# Altium PCB 2024 Power Distribution Board.PcbDoc
Units mm, origin at the board's own origin, x right, y up, seen from the top; angles counter-clockwise.
Board outline 127 x 165.1 mm, 2 copper layers (Top Layer, Bottom Layer); 42 components, 35 nets, 200 pads, 0 vias.
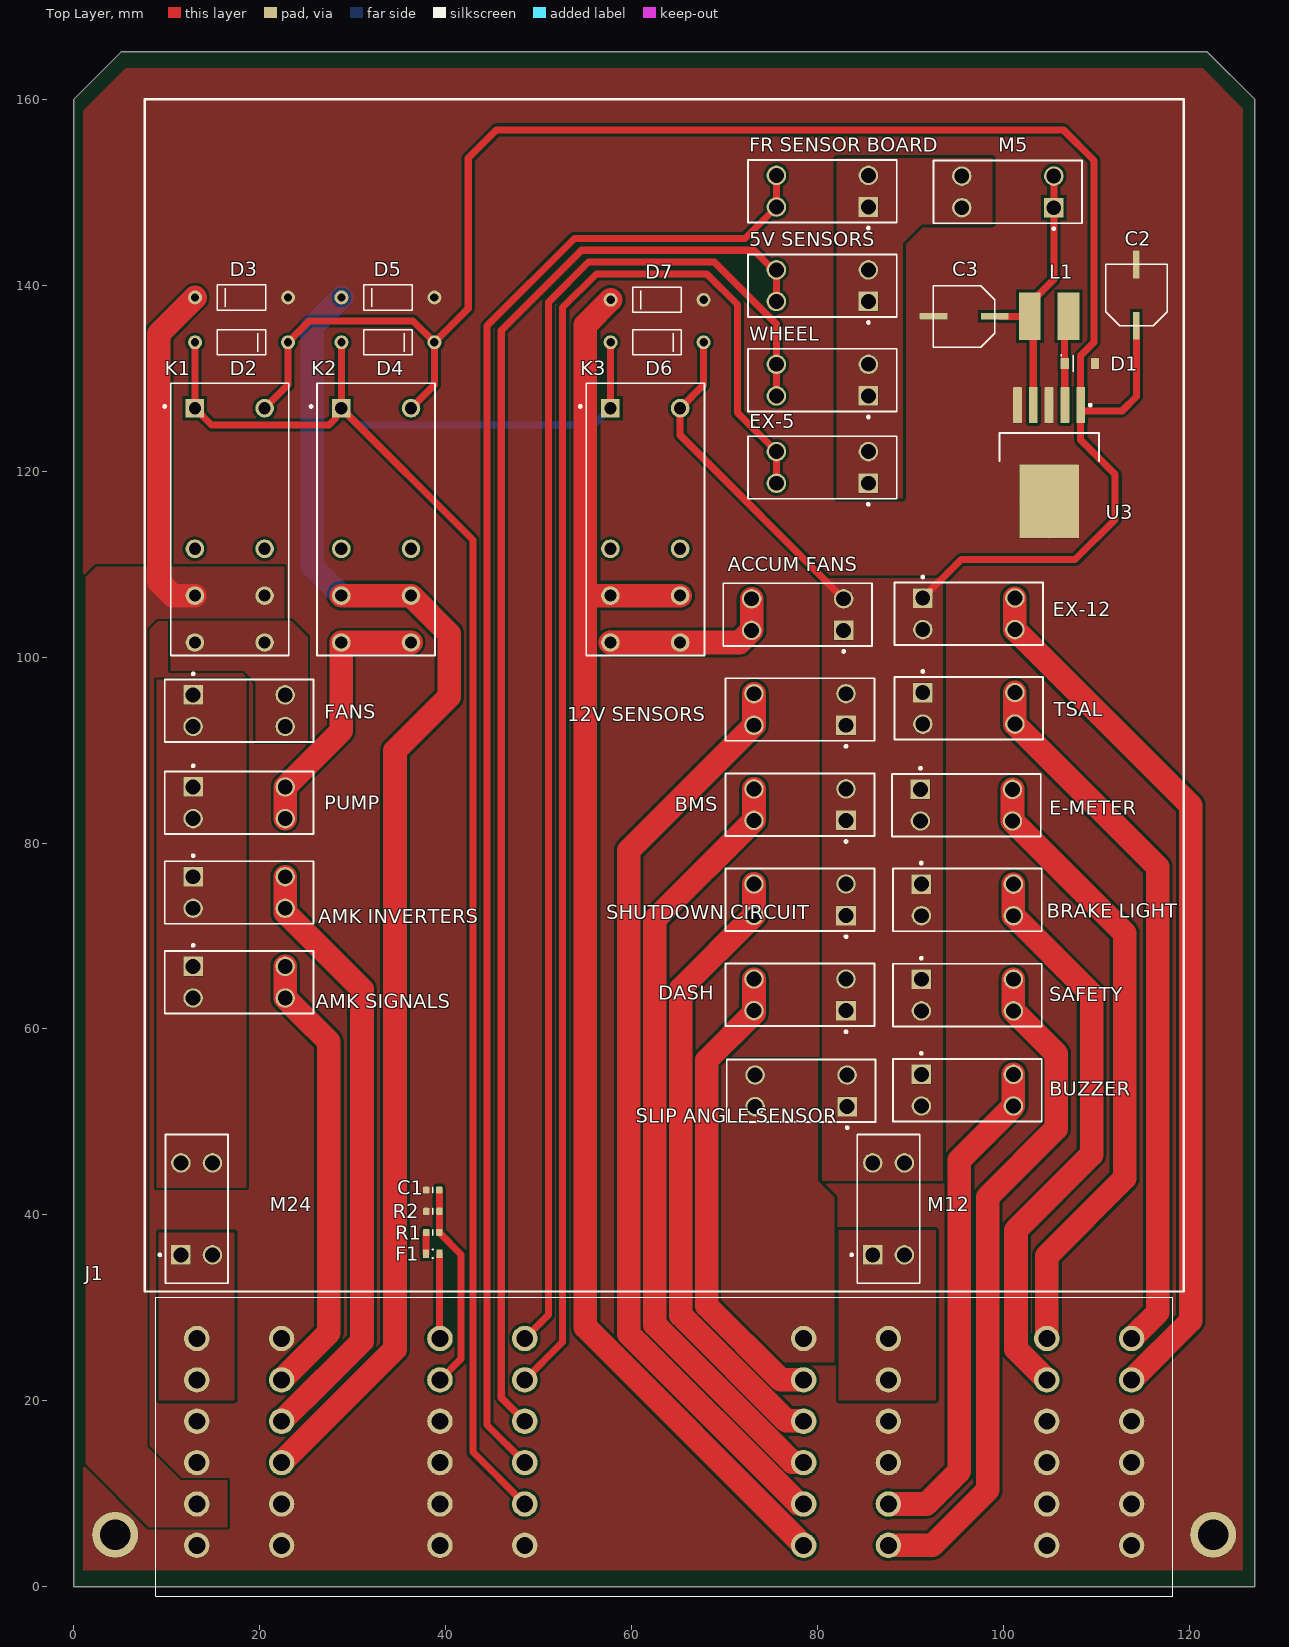
[diagram p0: Top Layer view]
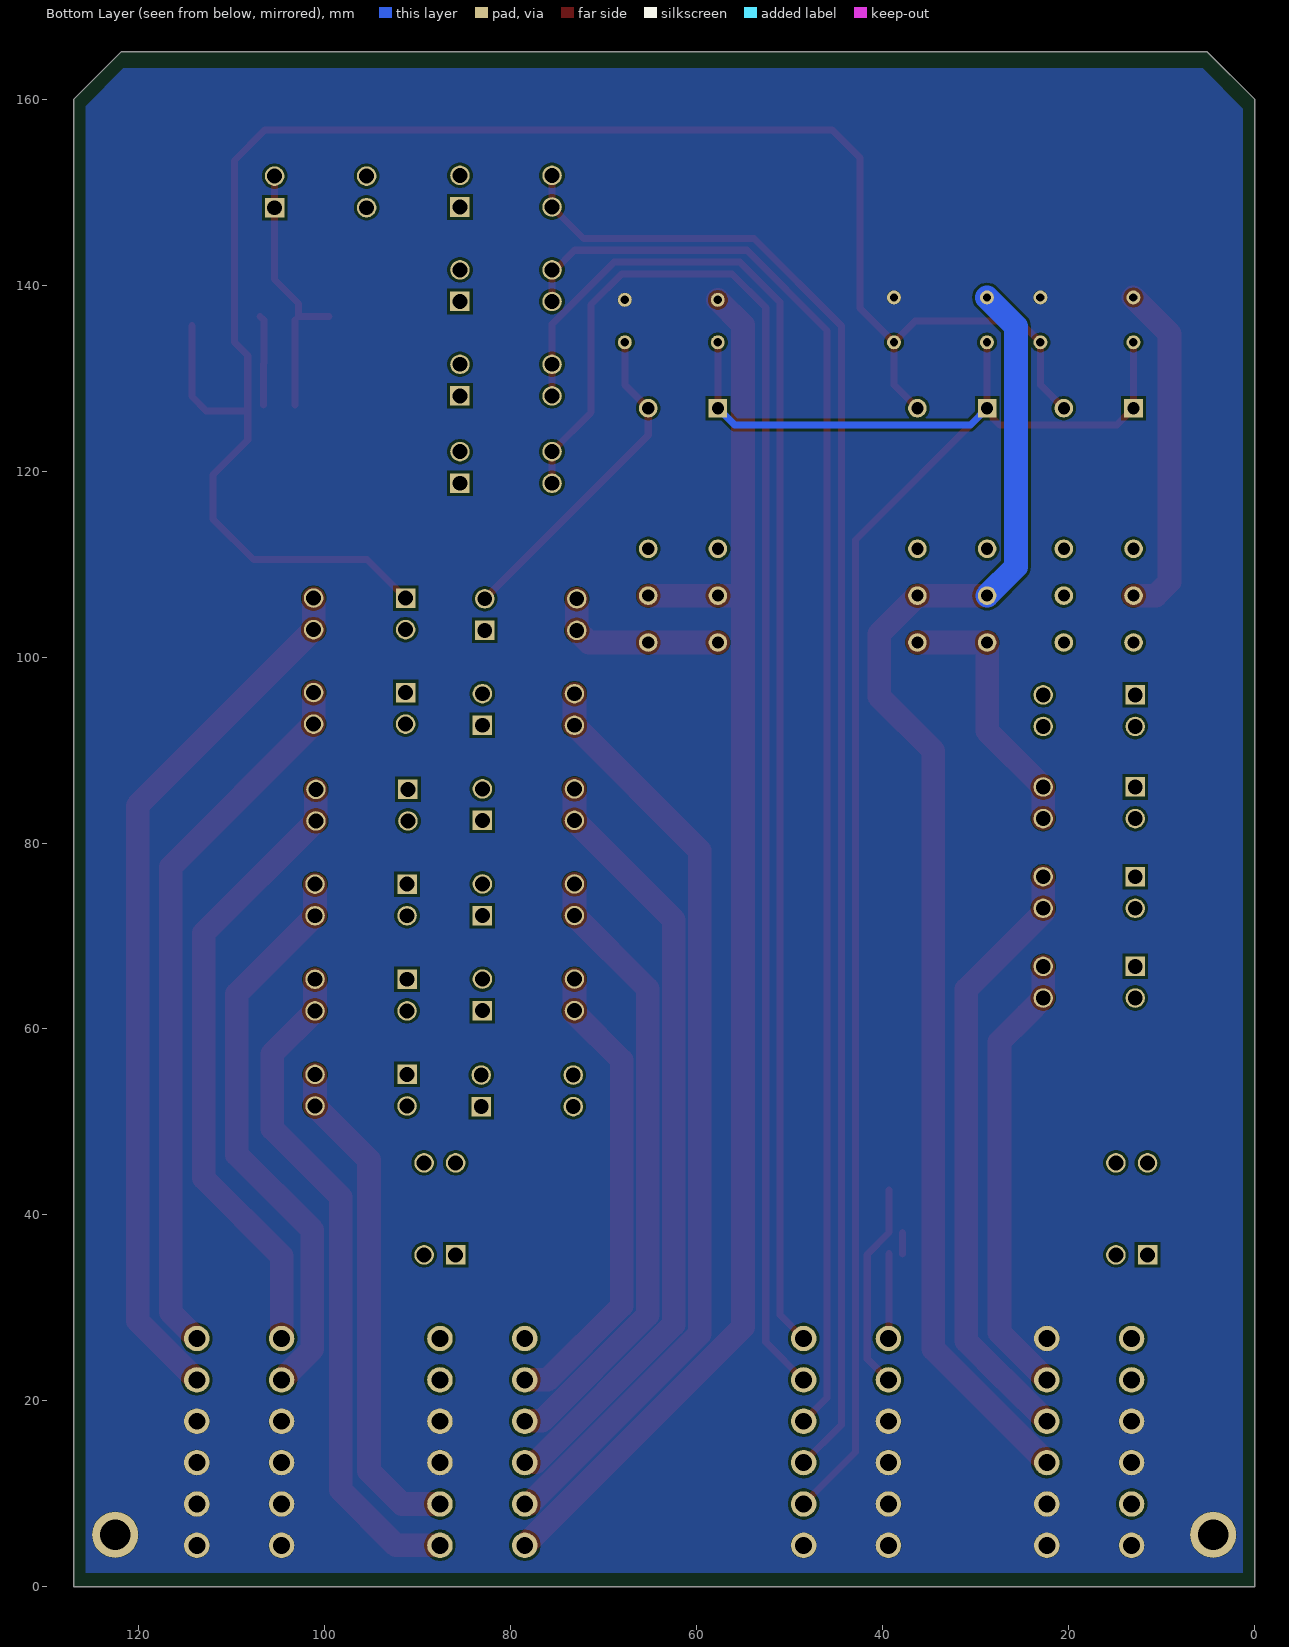
[diagram p1: Bottom Layer view, seen from below]
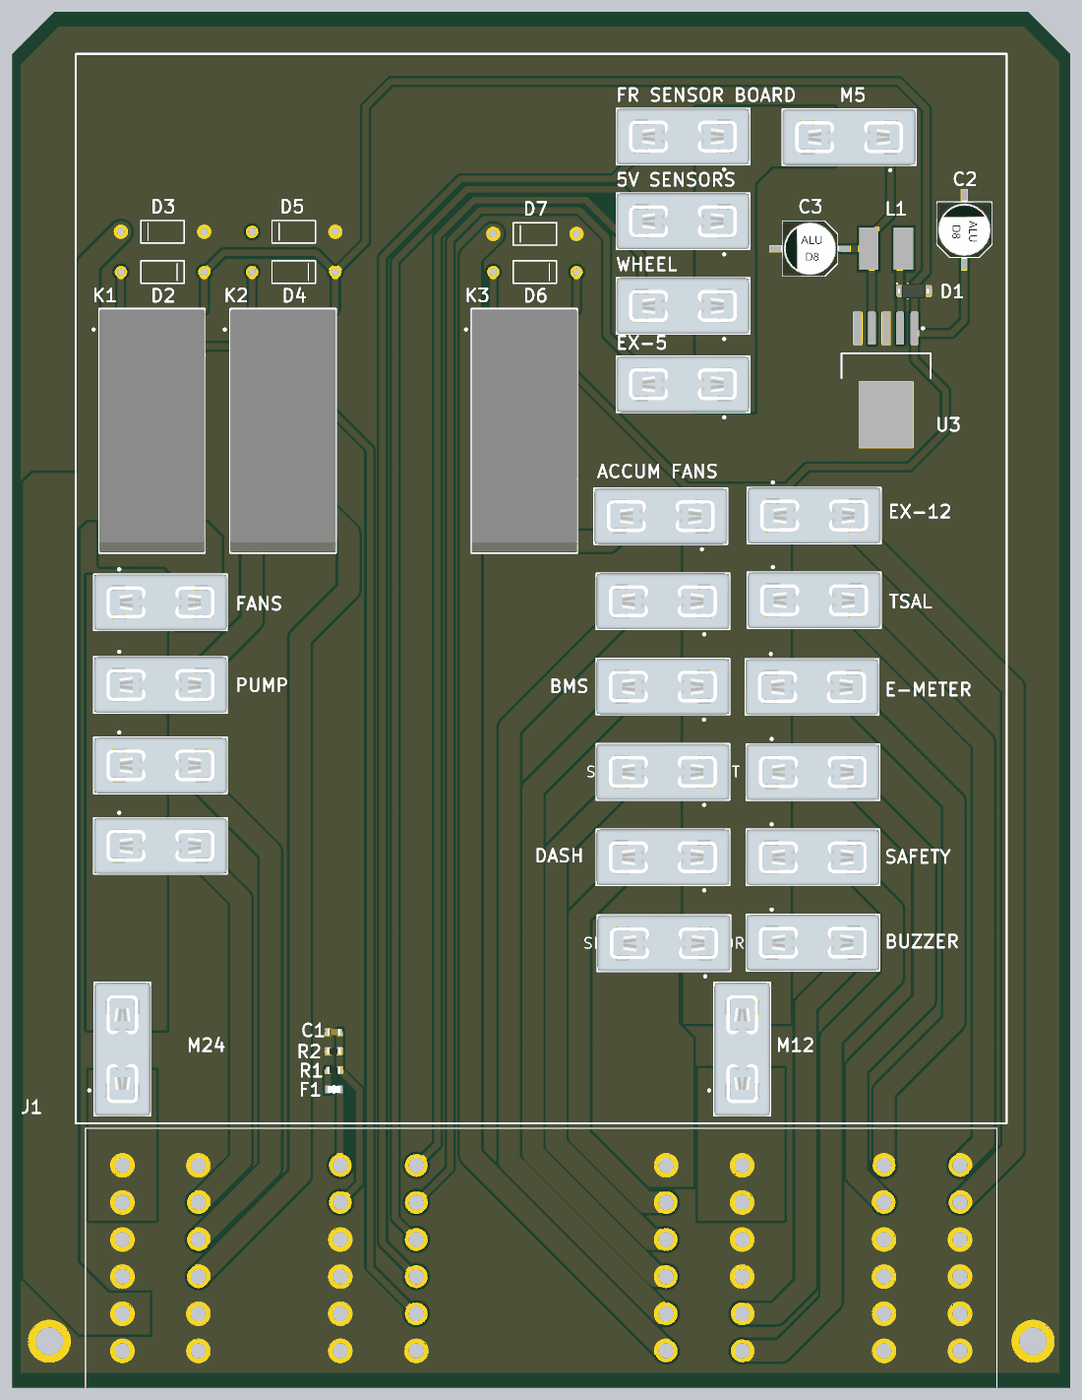
[diagram p2: 3D render of the assembled board from above, using the file's embedded part models]

## Layer stack, top to bottom
Top Solder: solder mask 0.0102, Solder Resist, Dk 3.5
Top Layer: signal copper 0.07
Dielectric 1: dielectric 0.32, FR-4, Dk 4.8
Bottom Layer: signal copper 0.07
Bottom Solder: solder mask 0.0102, Solder Resist, Dk 3.5

## Board outline
0,0 127,0 127,160.02 121.92,165.1 5.08,165.1 0,160.02

## Design rules (kind name [scope] priority, off if disabled: settings)
Clearance [All] p1: gap=0.3 ignorepadtopadclearanceinfootprint=FALSE except(0.13: SMDPad-SMDPad; 0.152: Arc-Arc Arc-Track Track-Track; 0.2: Arc-SMDPad Track-SMDPad)
Height [All] p1: minheight=0 maxheight=50.8 prefheight=12.7
PolygonConnect [All] p1: connectstyle=Relief reliefconductorwidth=0.254 reliefentries=4 polygonreliefangle="90 Angle" airgapwidth=0
RoutingVias [All] p1: holewidth=0.3 width=0.6 viastyle="Through Hole" minholewidth=0.3 minwidth=0.6 maxholewidth=0.3 maxwidth=0.6
SolderMaskExpansion [All] p1: expansion=0.102 istentingtop=FALSE
Width [All] p1: maxlimit=7.62 minlimit=0.254 preferedwidth=0.508 minimp=50.000000 maximp=50.000000 favimp=50.000000
29 further rules are at their usual default settings.

## Classes and differential pairs
component class "2024 LV BMS": C1 F1 R1 R2

## Components (designator, comment, footprint, x,y, rotation, side; value= is the part's Value field where it differs from the comment)
"5V SENSORS" "5V Sensors" KSTN-3568_V 80.518,139.954 r180 top
"12V SENSORS" "12V Sensors" KSTN-3568_V 78.105,94.361 r180 top
"ACCUM FANS" "ACCUM FANS" KSTN-3568_V 77.854,104.57 r180 top
"AMK INVERTERS" "AMK Inverter" KSTN-3568_V 17.78,74.676 r0 top
"AMK SIGNALS" "AMK Signals" KSTN-3568_V 17.78,65.024 r0 top
BMS "BMS Primary" KSTN-3568_V 78.105,84.128 r180 top
"BRAKE LIGHT" "Brake Light" KSTN-3568_V 96.112,73.878 r0 top
BUZZER "Buzzer" KSTN-3568_V 96.112,53.413 r0 top
C1 "CMP-001-00016-4" CAPC0603(1608)100_L 38.608,42.672 r180 top value=10µF
C2 "680uF" CAP-6.3D7.7H-SMD 114.3,138.938 r90 top
C3 "220uF" CAP-6.3D7.7H-SMD 95.756,136.652 r180 top
D1 "CMP-051-000011-1" SOD123 108.204,131.572 r0 top
D2 "1N914" DO41-10 18.034,133.858 r0 top
D3 "1N914" DO41-10 18.034,138.684 r180 top
D4 "1N914" DO41-10 33.782,133.858 r0 top
D5 "1N914" DO41-10 33.782,138.684 r180 top
D6 "1N914" DO41-10 62.738,133.858 r0 top
D7 "1N914" DO41-10 62.738,138.43 r180 top
DASH "Dashboard" KSTN-3568_V 78.105,63.663 r180 top
E-METER "E-Meter" KSTN-3568_V 96.012,84.074 r0 top
EX-5 "EX-5" KSTN-3568_V 80.518,120.396 r180 top
EX-12 "EX-12-D" KSTN-3568_V 96.266,104.648 r0 top
F1 "SF-0603S050-2" FP-SF-0603S-MFG 38.608,35.814 r0 top value=232mΩ
FANS "Fans" KSTN-3568_V 17.78,94.234 r0 top
"FR SENSOR BOARD" "Front Sensor Board" KSTN-3568_V 80.518,150.114 r180 top
J1 "DT13-12PA-R015" DT1312PAR015 104.66,26.698 r180 top locked
K1 "RZ03-1C4-D012" FP-RZ03-1C4-D024-MFG 16.764,114.808 r270 top
K2 "RZ03-1C4-D012" FP-RZ03-1C4-D024-MFG 32.512,114.808 r270 top
K3 "RZ03-1C4-D012" FP-RZ03-1C4-D024-MFG 61.468,114.808 r270 top
L1 "33uH" IND-6045 104.902,136.652 r180 top
M5 "MASTER 5V" KSTN-3568_V 100.46,150.036 r180 top
M12 "MASTER 12V" KSTN-3568_V 87.63,40.64 r90 top
M24 "MASTER 24V" KSTN-3568_V 13.208,40.64 r90 top
PUMP "Pump" KSTN-3568_V 17.78,84.328 r0 top
R1 "CMP-009-00069-1" RESC0603(1608)_L 38.608,38.1 r180 top value=100k
R2 "CMP-009-00069-1" RESC0603(1608)_L 38.608,40.386 r0 top value=5k
SAFETY "Safety" KSTN-3568_V 96.112,63.645 r0 top
"SHUTDOWN CIRCUIT" "Shutdown Circuit" KSTN-3568_V 78.105,73.896 r180 top
"SLIP ANGLE SENSOR" "Slip Angle Sensor" KSTN-3568_V 78.232,53.34 r180 top
TSAL "TSAL" KSTN-3568_V 96.266,94.488 r0 top
U3 "LM2592HVS-5.0" KTT0005B_L 104.902,120.904 r270 top
WHEEL "Steering Wheel Board" KSTN-3568_V 80.518,129.794 r180 top

## Footprints (in the part's own frame and the unit in brackets; to place one, negate y for a bottom-side part, rotate by r counter-clockwise, add the part's x,y. Pads: shape width x height; smd on the part's side, far side on the other; paste and mask are expansions set on the pad)
CAP-6.3D7.7H-SMD [mm]
  rect 3x0.7 smd: NEG(3.3,0) POS(-3.3,0)
  silkscreen extent -3.3,-3.3 3.3,3.3, body extent -3.5,-3.3 3.5,3.3, height 7.7
CAPC0603(1608)100_L [mm] "Chip Capacitor, Body 1.6x0.8mm, Height 1.0mm, IPC High Density"
  rrect25% 0.66x0.76 smd: 1(-0.7,0) 2(0.7,0)
  silkscreen extent 0,-0.3 0,0.3, body extent -0.8,-0.4 0.8,0.4, height 0.95
DO41-10 [mm]
  round 1.5 hole 0.9 unplated: A(-5,0) K(5,0)
  silkscreen extent -2.6,-1.35 2.6,1.35, body extent -2.6,-1.34 2.6,1.35, height 2.85
DT1312PAR015 [mm]
  round 2.739 hole 1.826: A1(0,0) A2(0,4.45) A3(0,8.9) A4(0,13.35) A5(0,17.8) A6(0,22.25) A7(-9.12,22.25) A8(-9.12,17.8) A9(-9.12,13.35) A10(-9.12,8.9) A11(-9.12,4.45) A12(-9.12,0) B1(91.44,0) B2(91.44,4.45) B3(91.44,8.9) B4(91.44,13.35) B5(91.44,17.8) B6(91.44,22.25) B7(82.32,22.25) B8(82.32,17.8) B9(82.32,13.35) B10(82.32,8.9) B11(82.32,4.45) B12(82.32,0) C1(26.16,0) C2(26.16,4.45) C3(26.16,8.9) C4(26.16,13.35) C5(26.16,17.8) C6(26.16,22.25) C7(17.04,22.25) C8(17.04,17.8) C9(17.04,13.35) C10(17.04,8.9) C11(17.04,4.45) C12(17.04,0) D1(65.28,0) D2(65.28,4.45) D3(65.28,8.9) D4(65.28,13.35) D5(65.28,17.8) D6(65.28,22.25) D7(56.16,22.25) D8(56.16,17.8) D9(56.16,13.35) D10(56.16,8.9) D11(56.16,4.45) D12(56.16,0)
  round 4.95 hole 3.3: MH1(-17.895,21.11) MH2(100.215,21.11)
  silkscreen extent -13.56,-4.45 95.88,27.71
FP-RZ03-1C4-D024-MFG [mm]
  round 2 hole 1.3 paste-1000 mask+0: 11(8.2,-3.75) 11(8.2,3.75) 12(3.16,3.75) 12(3.16,-3.75) 14(13.24,-3.75) 14(13.24,3.75) A2(-11.96,3.75)
  rect 2x2 hole 1.3 paste-1000 mask+0: A1(-11.96,-3.75)
  silkscreen extent -14.65,-7.12 14.65,6.35, body extent -14.6,-6.45 14.6,6.45, height 0.25
FP-SF-0603S-MFG [mm]
  rect 0.65x0.9 smd paste+0 mask+0: 1(-0.725,0) 2(0.725,0)
  silkscreen extent -0.03,-0.45 0.03,0.45, body extent -1.15,-0.55 1.15,0.55, height 0.25
IND-6045 [mm]
  rect 2.35x5.1 smd: 1(-2.075,0) 2(2.075,0)
  body extent -3.15,-3 3.15,3, height 4.5
KSTN-3568_V [mm] "THD, 4-Leads, Body 16x6.73mm, Pitch 9.9mm"
  rect 2.1x2.1 hole 1.6: 1(-4.95,1.7)
  round 2.1 hole 1.6: 2(-4.95,-1.7) 3(4.95,1.7) 4(4.95,-1.7)
  silkscreen extent -8,-3.36 8,4.09, body extent -8,-3.37 8,3.37, height 7.44
KTT0005B_L [mm] "DPAK, 5-Leads, Body 10.65x9.65mm, Pitch 1.7mm, IPC High Density"
  rrect11% 3.85x0.95 smd: 1(-6.2,3.4) 2(-6.2,1.7) 3(-6.2,0) 4(-6.2,-1.7) 5(-6.2,-3.4)
  rrect2% 7.9x6.4 smd: 6(4.15,0)
  silkscreen extent -6.32,-5.35 -0.2,5.35, body extent -3.2,-5.32 6.45,5.33, height 4.83
RESC0603(1608)_L [mm] "Chip Resistor, Body 1.6x0.8mm, IPC High Density"
  rrect25% 0.66x0.76 smd: 1(-0.7,0) 2(0.7,0)
  silkscreen extent 0,-0.3 0,0.3, body extent -0.8,-0.4 0.8,0.4, height 0.45
SOD123 [mm] "SODFL, 2-Leads, Body 1.55x3.70mm, IPC Medium Density"
  rect 0.9x1.2 smd: A(1.635,0) K(-1.635,0)
  silkscreen extent -2.03,-0.9 -0.7,0.95, body extent -1.85,-0.85 1.85,0.85, height 1.3

## Part data
"5V SENSORS" "12V SENSORS" "ACCUM FANS" "AMK INVERTERS" "AMK SIGNALS" BMS "BRAKE LIGHT" BUZZER DASH E-METER EX-5 EX-12 FANS "FR SENSOR BOARD" M5 M12 M24 PUMP SAFETY "SHUTDOWN CIRCUIT" "SLIP ANGLE SENSOR" TSAL WHEEL: library part CMP-2000-05464-1, "Fuse Holder, 20 A, 500 V, -50 to 145 degC, 4-Pin THD, RoHS", Manufacturer=Keystone, Package Description="4-Pin Through Hole Device, Body 16 x 6.73 mm, Pitch 9.9 mm", Package Reference=3568, Datasheet URL=https://datasheet.ciiva.com/16294/m60-2p40-16294706.pdf, Datasheet Version=04/2013, Manufacturer URL=http://www.keyelco.com/, Mounting Technology=ThroughHole
C1: library part CMP-005-000576-1, "Chip Capacitor, 10 uF, +/- 10%, 16 V, 1206 (3216 Metric)", Capacitor Type=Ceramic, Case/Package=1206, Max Operating Temperature=125°C, Min Operating Temperature=-55°C, Tolerance=10%, Voltage Rating=16V, Available Preview Images=2D, Design Item ID=CMP-001-00016-4, Mounting Technology=SM, Pins=2, RoHS Compliant=True, Source="Integrated_Library - 12.03.21 - 15.39.SchLib"
C2 C3: library part CMP-050-000005-1, Design Item ID=CAP-6.3D7.7H-SMD, Source=ife19_Elec_Library.SchLib
D2 D3 D4 D5 D6 D7: library part CMP-010-000010-1, Design Item ID=DIODE-DO41-10, Source=ife19_Elec_Library.SchLib
F1: library part CMP-07399-000004-1, "FUSE BOARD MNT 500MA 50VDC 0603", Fuse Current=0.5A, Fuse Interrupt Ac Current=50A, Manufacturer="Bourns Inc.", Max Fuse Ac Voltage=35V, Max Fuse Dc Voltage=50V, Package=SF-0603S, Resistance=232mΩ, Temperature="-20°C to +105°C", Temperature Range High=+105°C, Temperature Range Low=-20°C, Automotive=No, Category=Fuse, ComponentLink2Description=Datasheet, ComponentLink2URL=https://www.bourns.com/docs/product-datasheets/sf0603s.pdf, Device Class L1="Circuit Protection", Device Class L2=Fuses, Device Class L3=unset, Digikey Description="FUSE BOARD MNT 500MA 50VDC 0603", Fuse Blow Speed=Slow, Fuse I2T=0.009A2Sec, Fuse Interrupt Dc Current=50A, Height=0.55mm, Ipc Land Pattern Name=CAPC16080X45, Lead Free=Yes, Manufacturer Part Number=SF-0603S050-2, Mouser Description="Surface Mount Fuses 0.50A Slow Blow SinglFuse", Octopart=https://octopart.com/sf-0603s050-2-bourns-10486821, RoHS=TRUE
J1: library part CMP-057-000070-1, "Automotive Connectors EEC HEADER", Manufacturer_Name="TE Connectivity", Mouser Part Number=571-DT13-12PA-R015, Datasheet Link=https://www.te.com/commerce/DocumentDelivery/DDEController?Action=showdoc&DocId=Customer+Drawing%7FDT13-XPX-R015%7F-%7Fpdf%7FEnglish%7FENG_CD_DT13-XPX-R015_-.pdf%7FDT13-12PA-R015, Design Item ID=DT13-12PA-R015, Geometry.Height=53.25mm, Manufacturer_Part_Number=DT13-12PA-R015, Mouser Price/Stock=https://www.mouser.co.uk/ProductDetail/TE-Connectivity-DEUTSCH/DT13-12PA-R015?qs=cgQJD%2FpJz0xZmI47WX6OlA%3D%3D, Source=DT13-12PA-R015.SchLib
K1 K2 K3: library part CMP-03395-000132-1, "RELAY GEN PURPOSE SPDT 16A 24V", Ambient Temperature Range High=+85°C, Ambient Temperature Range Low=-40°C, Coil Power=400mW, Coil Resistance=1440Ω, Coil Voltage=24V, Current Rating=16A, Manufacturer="TE Connectivity", Manufacturer Part Number=RZ03-1C4-D024, Automotive=No, Category=Relay, Coil Type=Non-Latching, ComponentLink2Description=Datasheet, ComponentLink2URL=https://www.te.com/commerce/DocumentDelivery/DDEController?Action=showdoc&DocId=Data+Sheet%7FRZ%7F0918%7Fpdf%7FEnglish%7FENG_DS_RZ_0918.pdf%7F2-1415899-3, Device Class L1=Electromechanical, Device Class L2=Relays, Device Class L3="Power Relays", Digikey Description="RELAY GEN PURPOSE SPDT 16A 24V", Height=15.7mm, Lead Free=Yes, Number Of Contacts=1, Octopart=https://octopart.com/2-1415899-3-te+connectivity-44326503, Package=RZ03-1C4-D024, RoHS=TRUE, Throw Configuration=SPDT
L1: library part CMP-052-000004-1, Design Item ID=IND-6045, Source=ife19_Elec_Library.SchLib
R1 R2: library part CMP-009-000068-1, "120R 0.1W 5% 0603 (1608 Metric)  SMD", Case-EIA=0603, Case-Metric=1608, Available Preview Images=2D, Case/Package=0603, Design Item ID=CMP-009-00069-1, Source="Integrated_Library - 12.03.21 - 15.39.SchLib", Technology=SMT
U3: library part CMP-0069-00241-3, "SIMPLE SWITCHER® Power Converter 150 KHz 2A Step-Down Voltage Regulator, 5-pin TO-263", Manufacturer="Texas Instruments", PackageTopMarking="NSUZXYTTE#*LM2592HVS*-5.0 P+", PowerWise=N, Code_JEDEC=MO-169-AB, ComponentLink1Description="Datasheet URL", ComponentLink1URL=http://www.ti.com/general/docs/lit/getliterature.tsp?genericPartNumber=LM2592HV&fileType=pdf, CompType=Switcher, PackageDescription="TO-263, Molded, .400 x .390 x .180in, 5 Lead, .067in Pitch, Surface Mount", PackageReference=KTT0005B, PinCount=5, RoHS=N
D1: Design Item ID=DIODE-SOD123, Source=ife19_Elec_Library.SchLib

## Nets (pads, with @x,y where several pads share a name; then routed paths per layer and width w, separated by ;. In a path a pad name is that pad's centre, name@x,y a point inside that pad or via, vN(x,y) a via of type N, cw(c..) or ccw(c..) an arc to the next point about the centre after c; other vN are vias at no path point)
"5V SENSORS": "5V SENSORS.3" "5V SENSORS.4" J1.D10 | length 155.8
  Top Layer w0.762: J1.D10 45.974,20.324 45.974,23.114 45.974,135.128 54.61,143.764 73.154,143.764 75.264,141.654 75.568,141.654 75.568,138.254
"12V SENSORS": "12V SENSORS.3" "12V SENSORS.4" J1.C5 | length 100.8
  Top Layer w2.54: 73.155,96.061 73.155,92.661 59.69,79.196 59.69,27.178 77.932,8.936 78.462,8.936 J1.C5
ACCUM_FANS: D7.K J1.C6 K3.11 | length 155
  Top Layer w2.54: D7.K 55.026,135.718 55.026,106.68 ; K3.11@65.218,106.608 57.718,106.608 55.098,106.608 55.026,106.68 ; J1.C6@78.462,4.486 55.026,27.922 55.026,106.68
"AMK INVERTER": "AMK INVERTERS.3" "AMK INVERTERS.4" J1.B10 | length 65.6
  Top Layer w2.54: J1.B10 26.846,22.304 26.88,22.304 30.988,26.412 30.988,64.262 22.73,72.52 22.73,72.976 22.73,76.376
"AMK SIGNALS": "AMK SIGNALS.3" "AMK SIGNALS.4" J1.B11 | length 48.5
  Top Layer w2.54: J1.B11 27.432,27.34 27.432,58.622 24.54,61.514 22.73,63.324 22.73,66.724
"BMS PRIMARY": BMS.3 BMS.4 J1.C4 | length 84.2
  Top Layer w2.54: BMS.4 BMS.3 62.484,71.757 62.484,28.194 77.292,13.386 78.462,13.386 J1.C4
"BRAKE LIGHT": "BRAKE LIGHT.3" "BRAKE LIGHT.4" J1.A2 | length 61.6
  Top Layer w2.54: 101.062,75.578 101.062,72.178 109.474,63.766 109.474,46.482 101.346,38.354 101.346,25.562 J1.A2
BUZZER: BUZZER.3 BUZZER.4 J1.C8 | length 54.2
  Top Layer w2.54: J1.C8 91.702,8.898 95.25,12.446 95.25,16.51 95.25,45.9 BUZZER.4 BUZZER.3
DASHBOARD: DASH.3 DASH.4 J1.C2 | length 51
  Top Layer w2.54: DASH.4 73.155,61.709 68.072,56.626 68.072,30.226 76.05,22.248 J1.C2
E-METER: E-METER.3 E-METER.4 J1.A1 | length 67.5
  Top Layer w2.54: E-METER.3 E-METER.4 113.03,70.306 113.03,43.942 104.66,35.572 J1.A1
EX-5: EX-5.3 EX-5.4 J1.D11 | length 159.7
  Top Layer w0.762: J1.D11 52.578,26.326 52.578,28.194 52.578,137.599 56.203,141.224 68.072,141.224 71.374,137.922 71.374,126.29 EX-5.4 EX-5.3
EX-12: EX-12.3 EX-12.4 J1.A11 | length 94.6
  Top Layer w0.762: 120.142,83.623 120.142,84.022
  Top Layer w2.54: EX-12.3 EX-12.4 120.142,84.022 ; J1.A11 120.142,28.61 120.142,83.623
FANS: D3.K J1.B5 K1.11 | length 36.7
  Top Layer w2.54: K1.11@13.014,106.608 10.632,106.608 9.144,108.096 9.144,134.794 D3.K
"FR SENSOR BOARD": "FR SENSOR BOARD.3" "FR SENSOR BOARD.4" J1.D9 | length 163.8
  Top Layer w0.762: J1.D9 44.45,17.398 44.45,20.066 44.45,135.636 53.848,145.034 72.188,145.034 75.568,148.414 75.568,151.814
"FUSED 5V": "5V SENSORS.1" "5V SENSORS.2" "FR SENSOR BOARD.1" "FR SENSOR BOARD.2" EX-5.1 EX-5.2 M5.3 M5.4 WHEEL.1 WHEEL.2
"FUSED 12V": "12V SENSORS.1" "12V SENSORS.2" "ACCUM FANS.1" "ACCUM FANS.2" "BRAKE LIGHT.1" "BRAKE LIGHT.2" "SHUTDOWN CIRCUIT.1" "SHUTDOWN CIRCUIT.2" "SLIP ANGLE SENSOR.1" "SLIP ANGLE SENSOR.2" BMS.1 BMS.2 BUZZER.1 BUZZER.2 C2.POS D2.K D4.K D6.K DASH.1 DASH.2 E-METER.1 E-METER.2 EX-12.1 EX-12.2 K1.A2 K2.A2 K3.A2 M12.3 M12.4 SAFETY.1 SAFETY.2 TSAL.1 TSAL.2 U3.1 | length 240.2
  Top Layer w0.762: K1.A2 23.034,129.288 D2.K 25.32,136.144 36.496,136.144 D4.K ; K2.A2 38.782,129.288 D4.K ; D6.K 67.738,129.288 K3.A2 65.218,123.856 82.804,106.27 ; 83.182,95.934 83.312,96.064 ; EX-12.1 95.458,110.49 107.696,110.49 112.014,114.808 112.014,119.477 ; U3.1@108.396,126.492 112.776,126.492 114.3,128.016 C2.POS ; 112.014,119.634 108.302,123.346 108.302,126.492 U3.1 108.302,132.432 109.728,133.858 109.728,153.416 106.426,156.718 45.466,156.718 42.418,153.67 42.418,137.494 D4.K
"FUSED 24V": "AMK INVERTERS.1" "AMK INVERTERS.2" "AMK SIGNALS.1" "AMK SIGNALS.2" FANS.1 FANS.2 M24.3 M24.4 PUMP.1 PUMP.2
GND: C1.2 C2.NEG C3.NEG D1.A D3.A D5.A D7.A J1.A3 J1.A4 J1.A5 J1.A6 J1.A7 J1.A8 J1.A9 J1.A10 J1.B3 J1.B4 J1.B6 J1.B7 J1.B8 J1.B12 J1.C9 J1.C10 J1.D3 J1.D4 J1.D5 J1.D6 J1.D7 J1.MH1 J1.MH2 R2.1 U3.3 U3.5 U3.6
HV_ENABLE: D2.A D4.A D6.A J1.D8 K1.A1 K2.A1 K3.A1 | length 195.3
  Top Layer w0.762: D2.A 13.024,133.848 13.024,126.778 K1.A1 14.814,124.968 27.432,124.968 28.143,125.679 28.143,126.149 K2.A1 ; D4.A 28.772,133.848 28.772,126.778 K2.A1 ; J1.D8 42.926,14.472 42.926,18.796 42.926,112.604 K2.A1 ; K3.A1 57.728,126.778 57.728,133.848 D6.A
  Bottom Layer w0.762: K2.A1 30.562,124.968 55.918,124.968 K3.A1
"NetACCUM FANS_3": "ACCUM FANS.3" "ACCUM FANS.4" K3.14 | length 19.1
  Top Layer w2.54: K3.14@57.718,101.568 71.602,101.568 72.904,102.87 72.904,106.27
NetC1_1: C1.1 J1.D2 R1.1 R2.2 | length 22.3
  Top Layer w0.762: C1.1 R2.2 R1.1 41.656,35.752 41.656,24.524 J1.D2
NetC3_POS: C3.POS L1.2 M5.1 M5.2 U3.4 | length 28.6
  Top Layer w0.762: C3.POS@99.568,136.652 L1.2 102.827,138.027 105.41,140.61 M5.1 M5.2 ; U3.4 L1.2@103.202,136.277
NetD1_K: D1.K L1.1 U3.2 | length 9.7
  Top Layer w0.762: U3.2 106.585,127.121 106.585,131.556 D1.K 106.569,136.244 L1.1
NetF1_1: F1.1 R1.2 | length 2.3
  Top Layer w0.762: F1.1 R1.2@37.883,38.075
NetF1_2: F1.2 J1.D1 | length 9.1
  Top Layer w0.762: J1.D1@39.333,26.745 F1.2
NetFANS_3: FANS.3 FANS.4 K1.14
NetK2_14: K2.14 PUMP.3 PUMP.4 | length 28.9
  Top Layer w2.54: PUMP.4 PUMP.3 28.762,92.06 28.762,101.568 K2.14@36.262,101.568
PUMP: D5.K J1.B9 K2.11 | length 144.6
  Top Layer w2.54: J1.B9 34.544,25.552 34.544,89.916 40.386,95.758 40.386,102.484 36.262,106.608 K2.11@28.762,106.608
  Bottom Layer w2.54: K2.11@28.762,106.608 25.654,109.716 25.654,135.556 D5.K
"RAW 12V": J1.C11 J1.C12 M12.1 M12.2
"RAW 24V": J1.B1 J1.B2 M24.1 M24.2
SAFETY: J1.C7 SAFETY.3 SAFETY.4 | length 73
  Top Layer w2.54: J1.C7 92.332,4.448 98.298,10.414 98.298,41.91 105.664,49.276 105.664,57.343 SAFETY.4 SAFETY.3
"SHUTDOWN CIRCUIT": "SHUTDOWN CIRCUIT.3" "SHUTDOWN CIRCUIT.4" J1.C3 | length 67.6
  Top Layer w2.54: 73.155,75.596 73.155,72.196 65.278,64.319 65.278,29.21 76.652,17.836 78.462,17.836 J1.C3
"SLIP ANGLE SENSOR": "SLIP ANGLE SENSOR.3" "SLIP ANGLE SENSOR.4" J1.C1
"STEERING WHEEL": J1.D12 WHEEL.3 WHEEL.4 | length 149.3
  Top Layer w0.762: J1.D12 51.054,29.252 51.054,31.242 51.054,138.176 55.372,142.494 68.88,142.494 75.568,135.806 WHEEL.4 WHEEL.3
TSAL: J1.A12 TSAL.3 TSAL.4 | length 77
  Top Layer w0.762: 116.586,77.119 116.586,77.418
  Top Layer w2.54: TSAL.3 TSAL.4 116.586,77.418 ; J1.A12 116.586,29.504 116.586,77.119
pads on no net: K1.12 K2.12 K3.12

## Polygon pours and split planes (outlines as drawn)
GND on Top Layer "GND_L01_P035" (solid, remove dead copper, pour order 35): 1.016,1.778 125.73,1.778 125.73,159.004 121.412,163.322 5.588,163.322 1.016,158.75
"FUSED 5V" on Top Layer "FUSED_5V_L01_P033" (solid, remove dead copper, pour order 33): 98.806,153.67 82.042,153.67 82.042,117.094 89.154,117.094 89.154,144.526 91.186,146.558 98.806,146.558
FANS on Top Layer "FANS_L01_P032" (solid, remove dead copper, pour order 32): 2.398,109.728 1.27,108.6 1.27,13.208 8.056,6.422 16.51,6.422 16.51,11.43 11.502,11.43 7.874,15.058 7.874,103.124 8.89,104.14 22.606,104.14 22.606,109.728
NetFANS_3 on Top Layer "NETFANS_3_L01_P031" (solid, remove dead copper, pour order 31): 23.368,103.886 25.146,102.108 25.146,90.932 19.558,90.932 19.558,97.282 18.288,98.552 10.414,98.552 10.414,103.886
"RAW 12V" on Top Layer "RAW_12V_L01_P027" (solid, remove dead copper, pour order 27): 82.296,38.354 82.296,20.066 92.71,20.066 92.71,38.354
"RAW 24V" on Top Layer "RAW_24V_L01_P023" (solid, remove dead copper, pour order 23): 9.144,38.1 17.272,38.1 17.272,20.066 9.144,20.066
"FUSED 24V" on Top Layer "FUSED_24V_L01_P024" (solid, remove dead copper, pour order 24): 8.89,42.926 18.542,42.926 18.542,97.536 8.89,97.536
"SLIP ANGLE SENSOR" on Top Layer "SLIP_ANGLE_SENSOR_L01_P030" (solid, remove dead copper, pour order 30): 70.104,56.642 69.596,56.134 69.596,30.734 76.2,24.13 81.788,24.13 81.788,41.91 80.01,43.688 80.01,56.642
"FUSED 12V" on Top Layer "FUSED_12V_L01_P028" (solid, remove dead copper, pour order 28): 80.518,108.458 80.518,43.688 93.472,43.688 93.472,108.458
GND on Bottom Layer "GND_L02_P034" (solid, remove dead copper, pour order 34): 1.27,1.524 125.73,1.524 125.73,159.258 121.666,163.322 5.588,163.322 1.27,159.004

## Silkscreen, mask and mechanical layers (free items; w line width, h text height)
Top Overlay:
  lines w0.254: 119.38,151.13 119.38,160.02 117.602,160.02 7.62,160.02 7.62,31.75 119.38,31.75 119.38,152.146